# Altium PCB ST25RU3993_RF_MODULE_STENCIL_REV_E.PcbDoc
Units mil, origin at the board's own origin, x right, y up, seen from the top; angles counter-clockwise.
Board outline 3350 x 3250 mil, 4 copper layers (Top Layer, GND, Power, Bottom Layer), stack 67.68 mil thick; 49 components, 107 nets, 218 pads, 32 vias.
Unrouted connection lines stored in the file: 84.
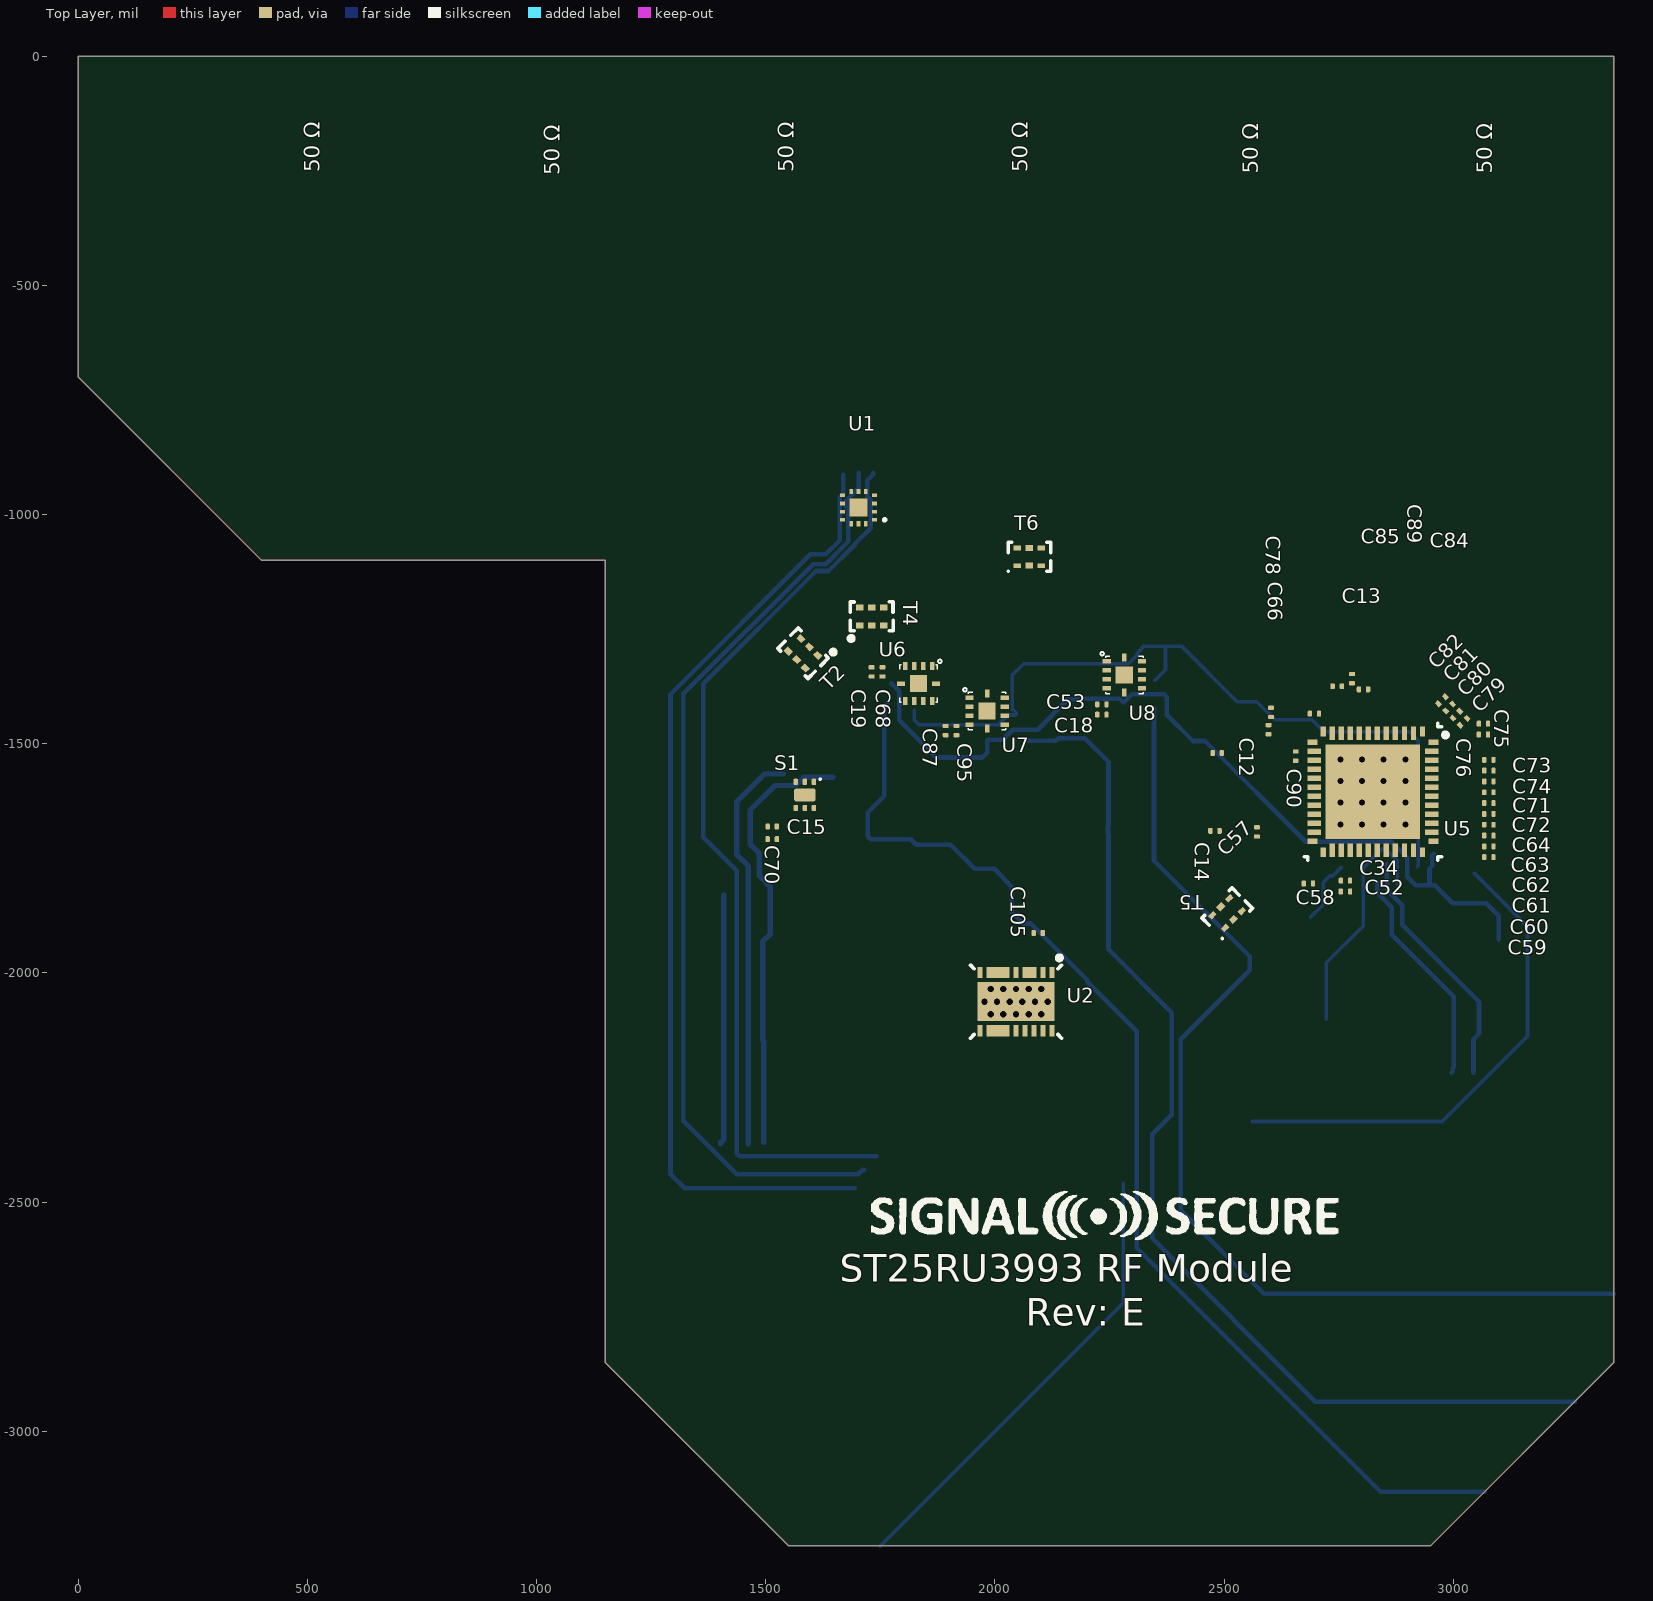
[diagram p0: Top Layer view]
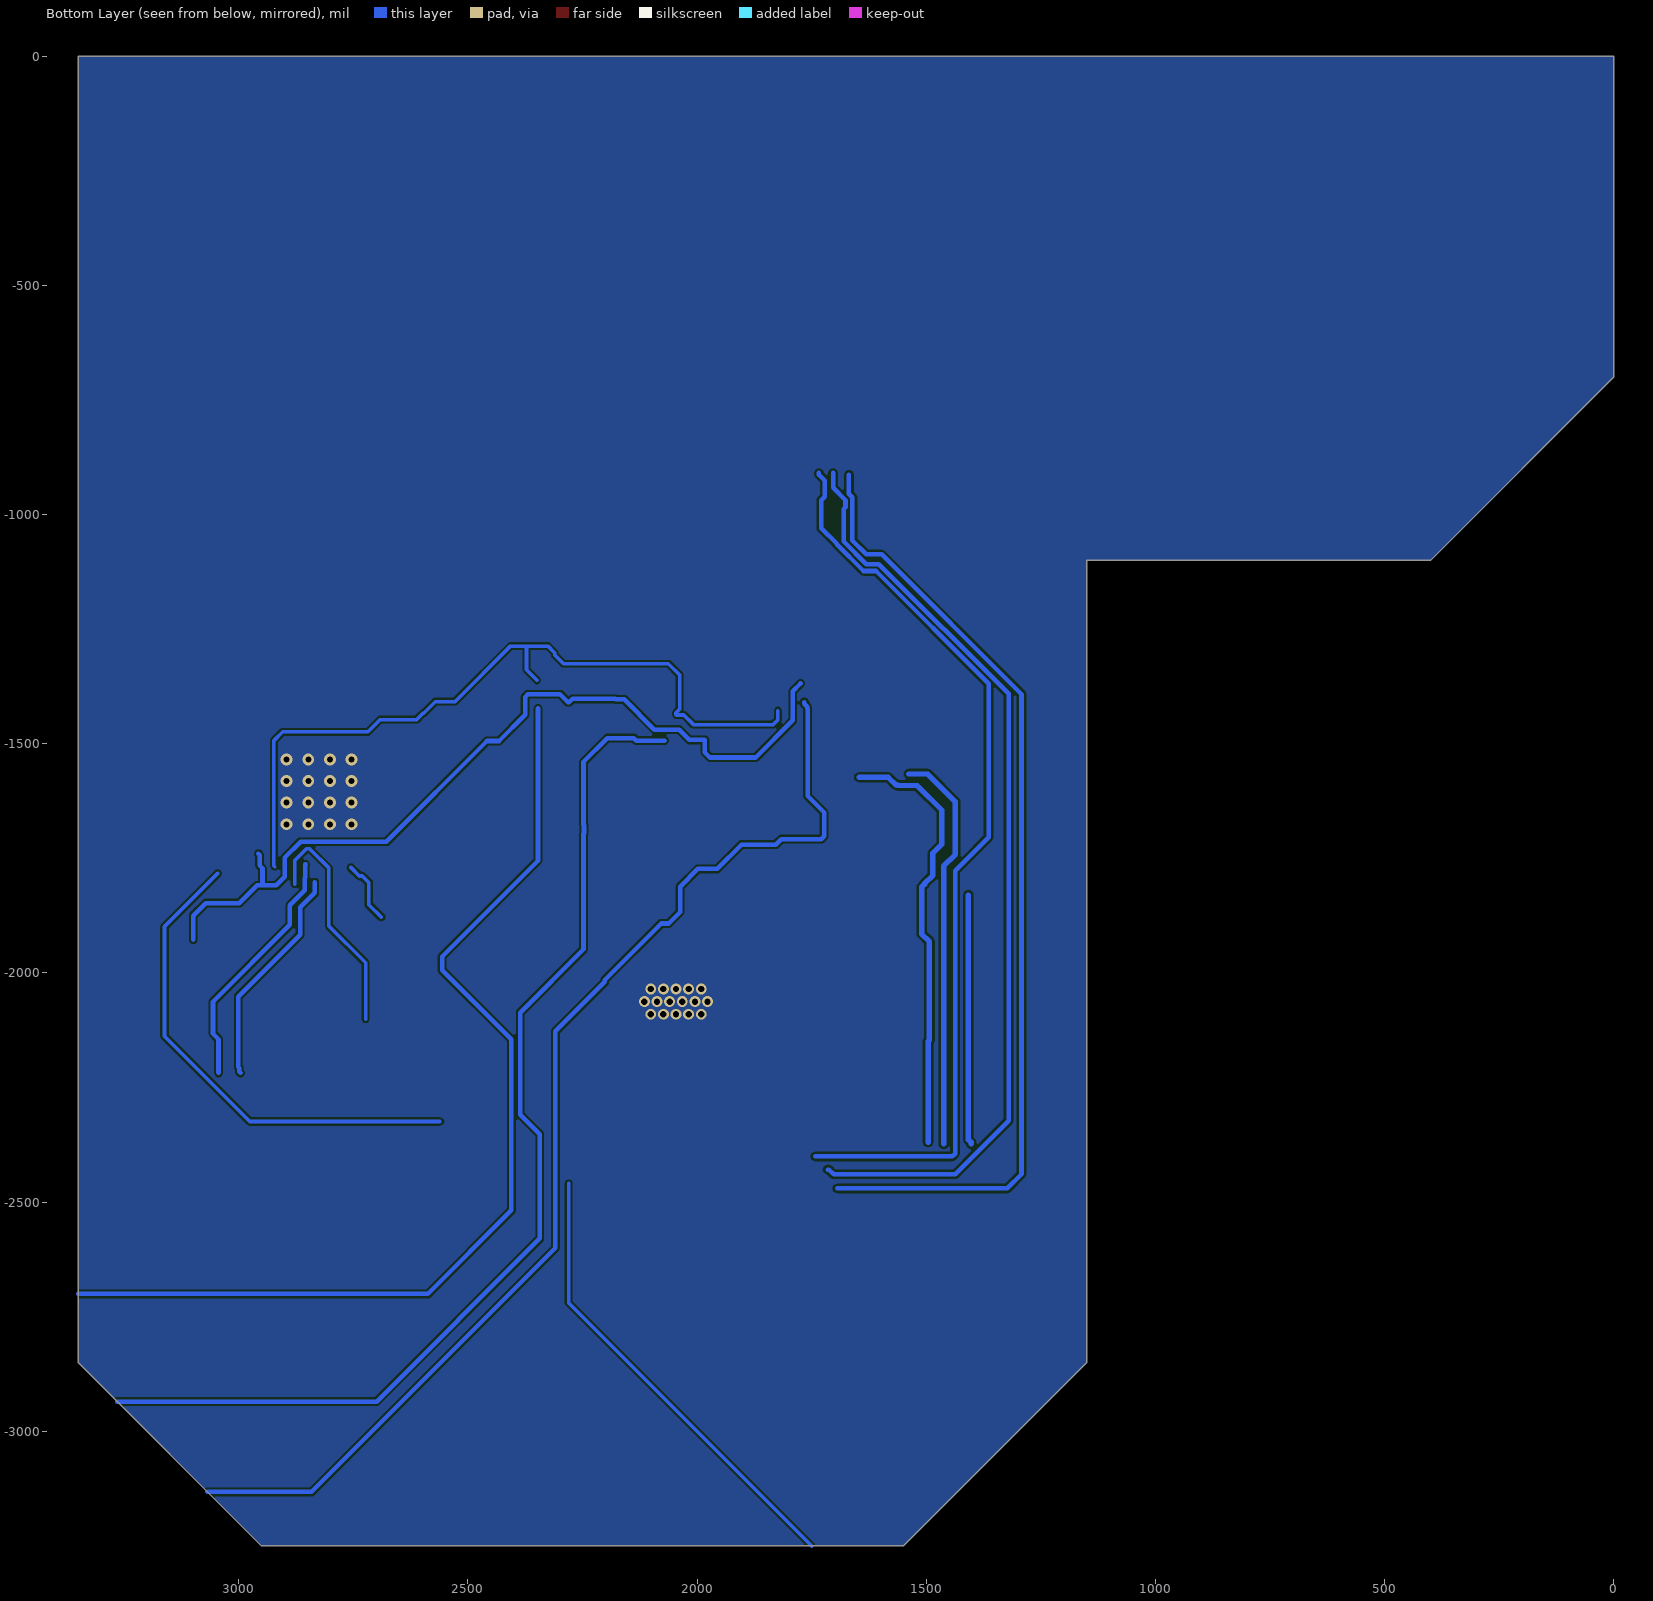
[diagram p1: Bottom Layer view, seen from below]
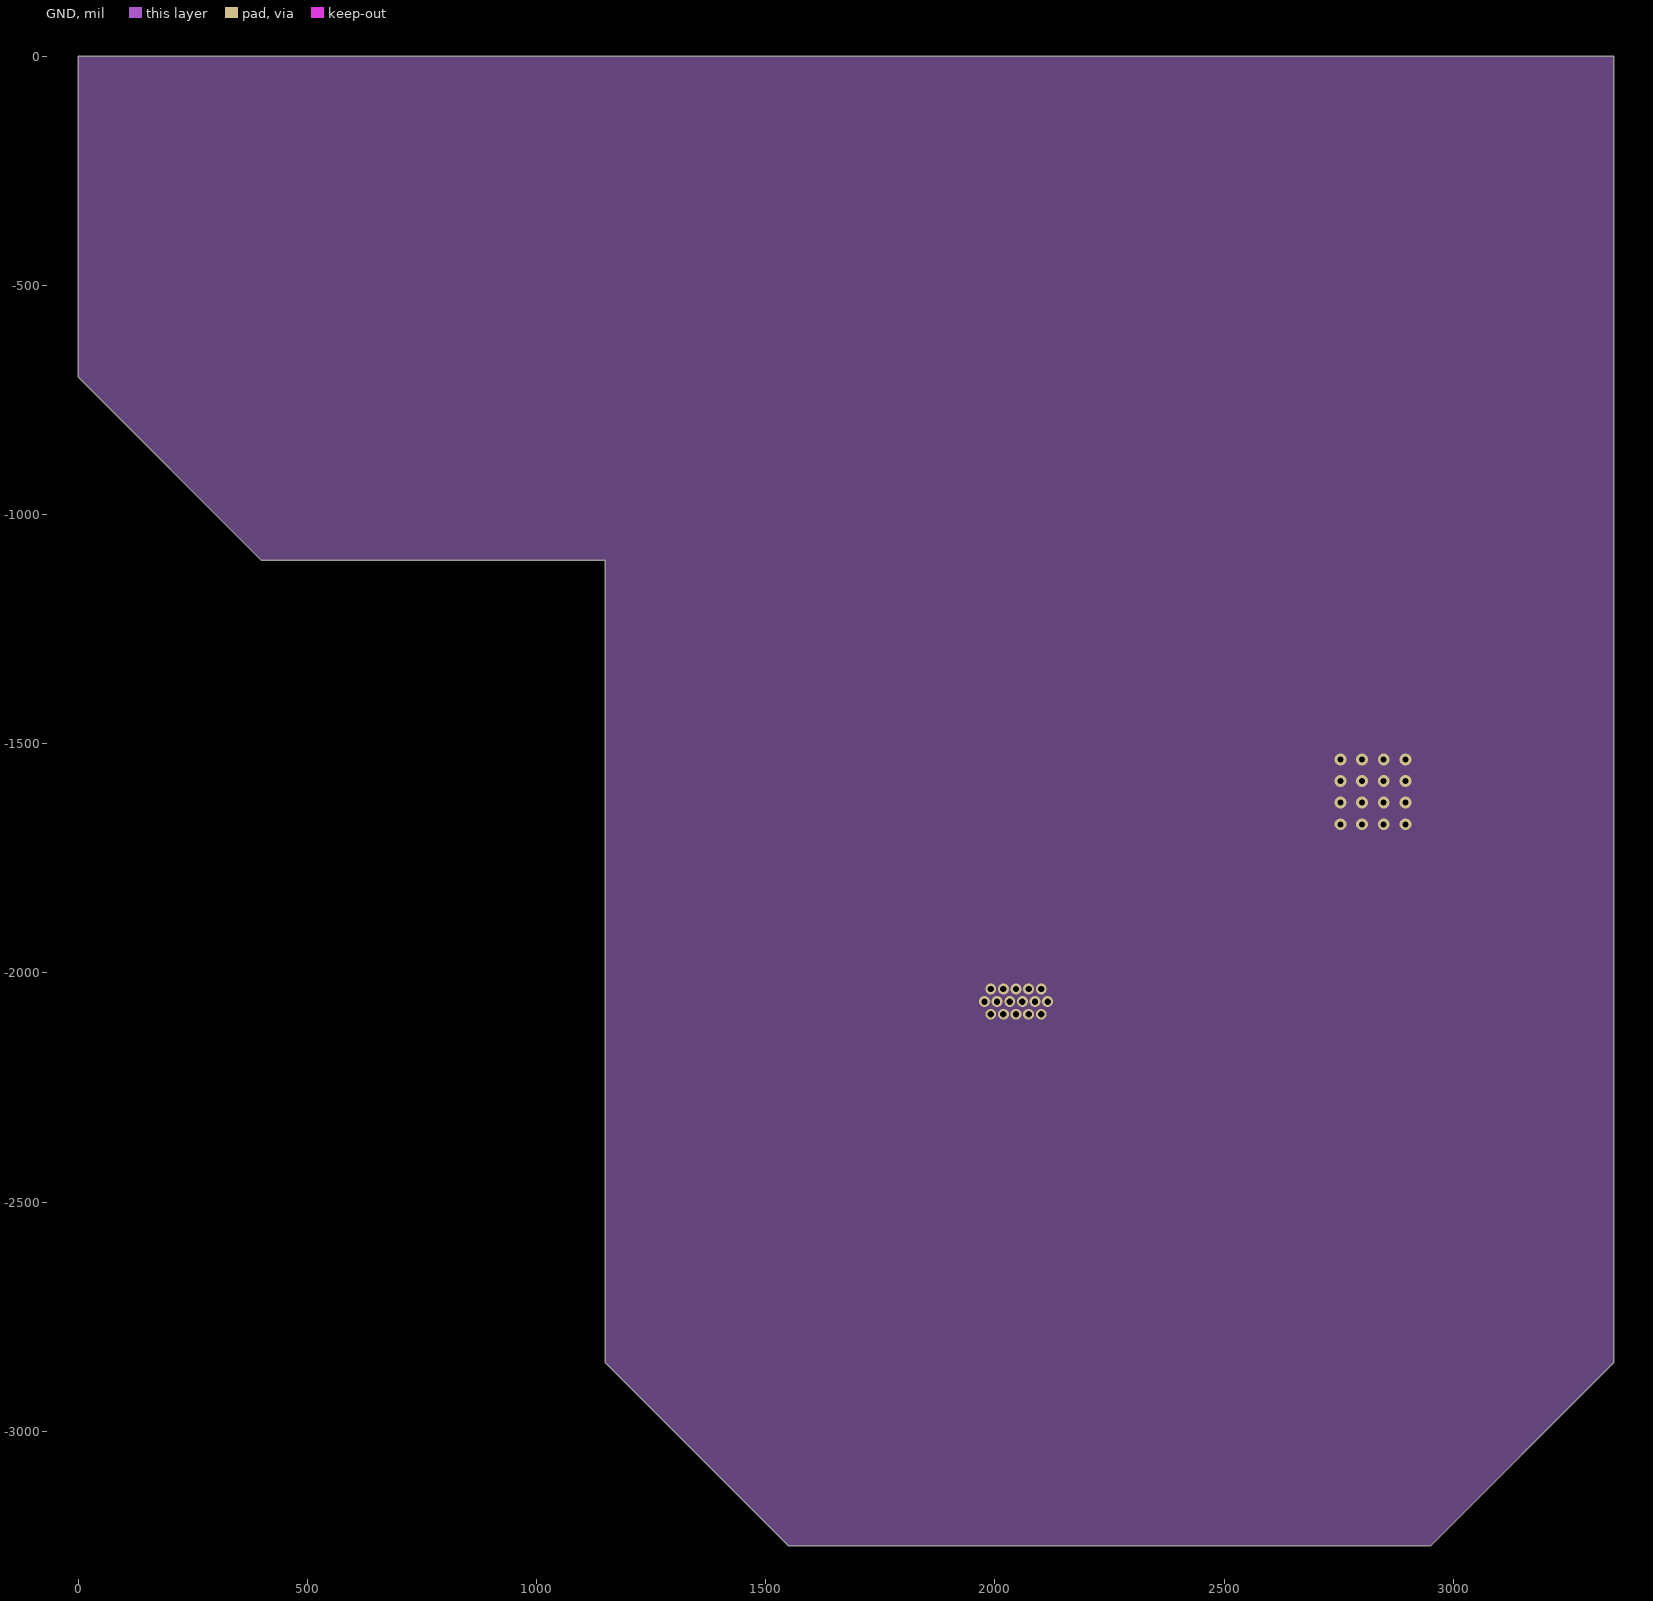
[diagram p2: GND]
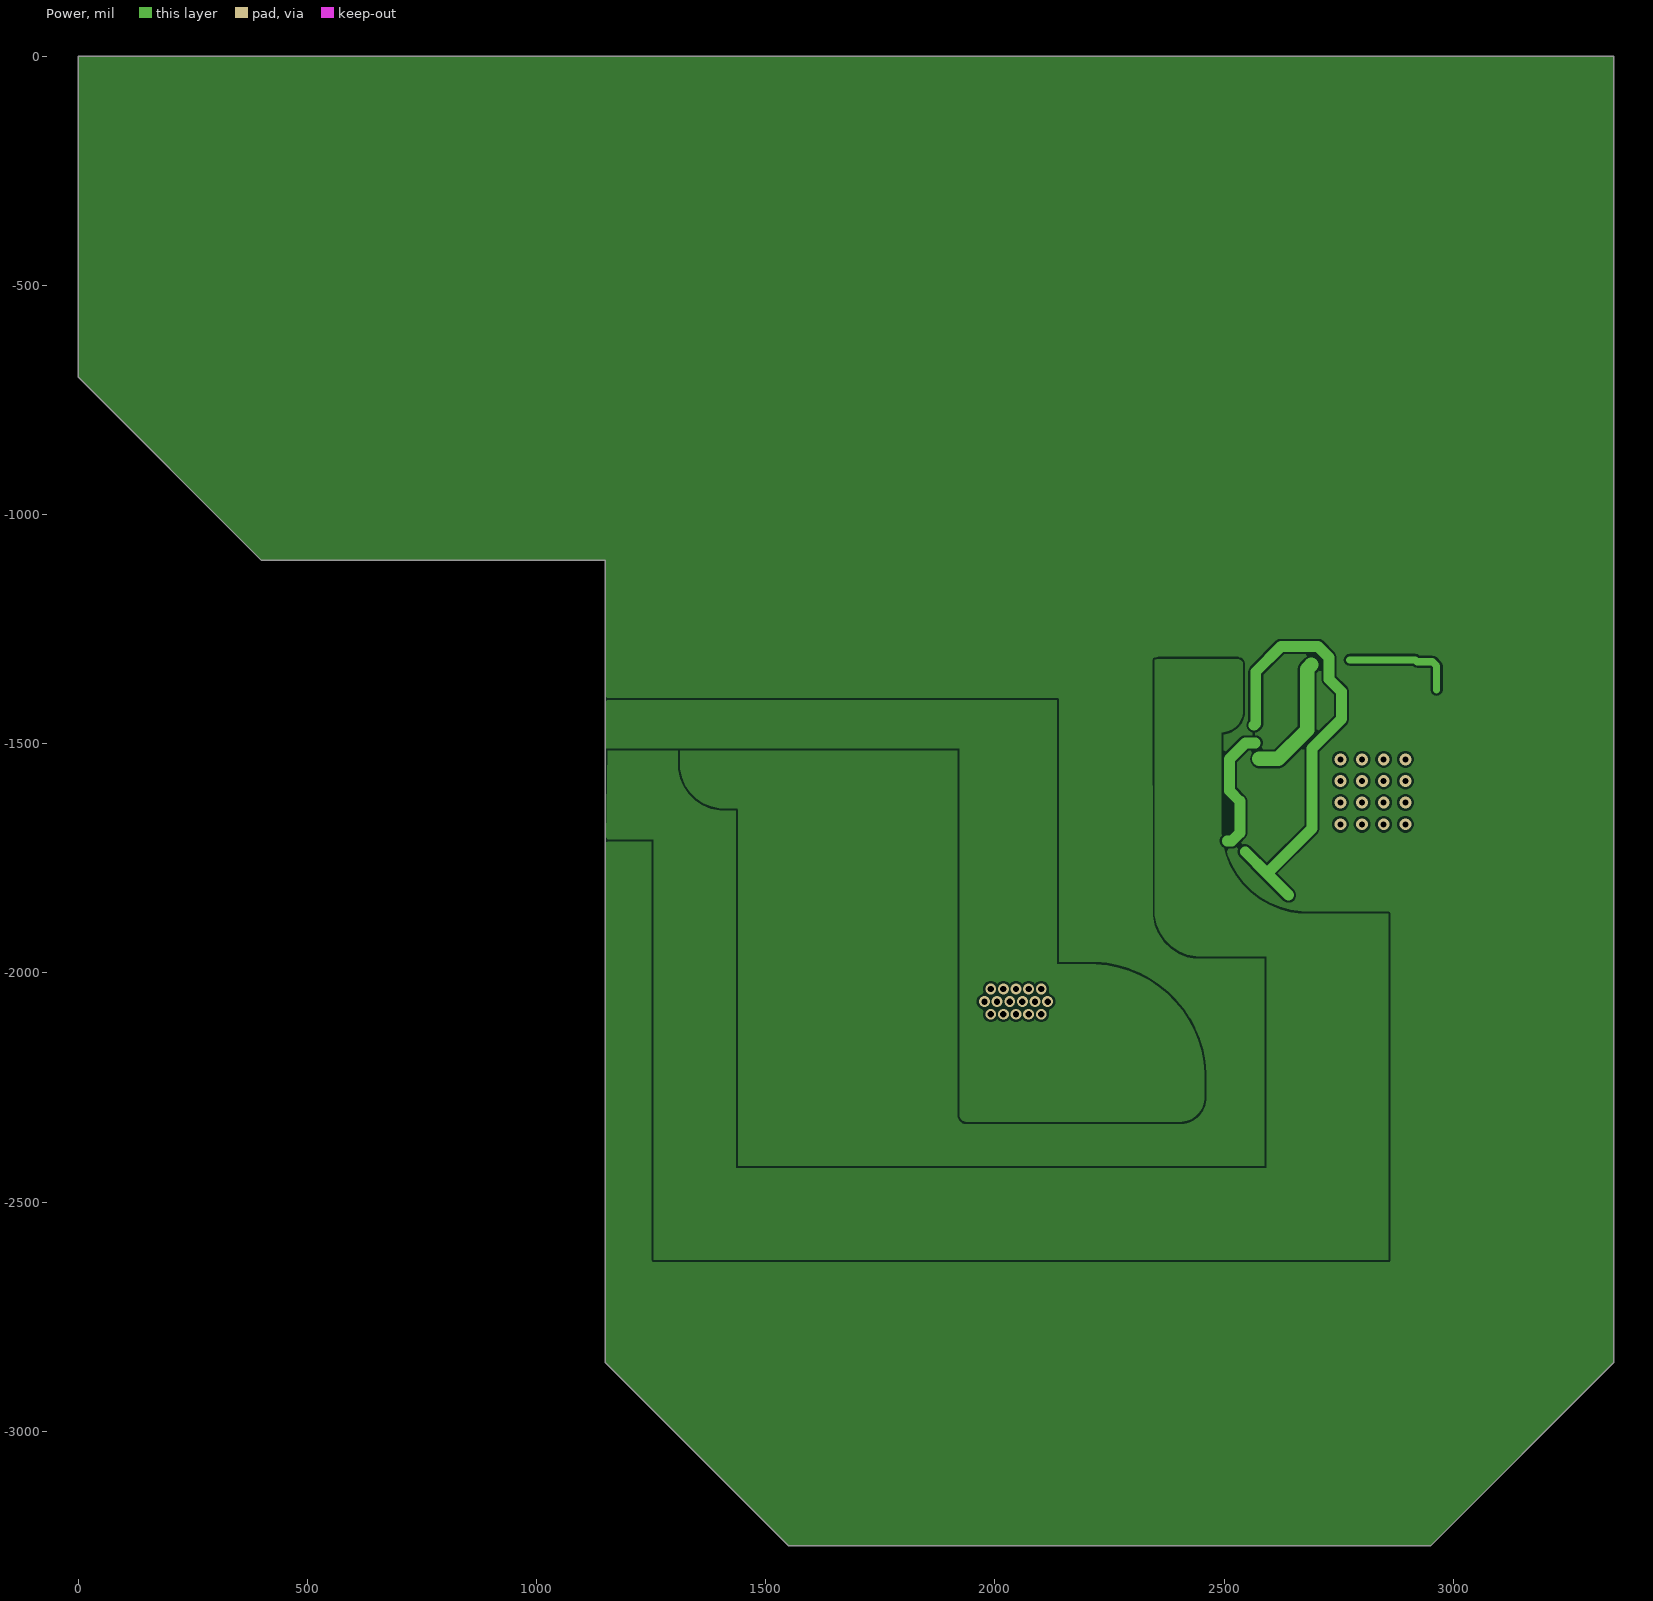
[diagram p3: Power]

## Layer stack, top to bottom
Top Solder: solder mask 1, Solder Resist, Dk 4.5
Top Layer: signal copper 1.7
Dielectric1: prepreg 7.96, FR408HR, Dk 3.69
GND: signal copper 0.68
Dielectric2: core 47, FR408HR, Dk 3.69
Power: signal copper 0.68
Dielectric 1: prepreg 7.96, FR408HR, Dk 3.69
Bottom Layer: signal copper 1.7
Bottom Solder: solder mask 1, Solder Resist, Dk 4.5

## Board outline
2950,-3250 3350,-2850 3350,0 0,0 0,-700 400,-1100 1150,-1100 1150,-2850 1550,-3250

## Design rules (kind name [scope] priority, off if disabled: settings)
AssemblyTestPointUsage [All] p1 off:
AssemblyTestpoint [All] p1 off: testpointundercomponent=TRUE minsize=40 maxsize=100 preferedsize=60 minholesize=0 maxholesize=40 preferedholesize=32 testpointgrid=1 usegrid=TRUE gridtolerance=0.01 allowsidetop=TRUE allowsidebottom=TRUE
Clearance [InNetClass('Differential_RF') and IsTrack or InNetClass('Differential_RF') and IsArc or InNetClass('Differential_RF') and IsPad or InNet('PAOUT_N')or InNet('PAOUT_P')or InNet('NetC5_2') or InNet('NetC4_2') or InNet('NetC7_2')or InNet('NetC6_1') vs InNamedPolygon('Top GND')] p1: gap=31.5 ignorepadtopadclearanceinfootprint=FALSE except(0: Arc-Hole Track-Hole SMDPad-Hole THPad-Hole Via-Hole Fill-Hole Poly-Hole Region-Hole Text-Hole)
Clearance Clearance_3 [InNetClass('SE_CPWG') and IsTrack or InNetClass('SE_CPWG') and IsArc or InNetClass('SE_CPWG') and IsPad vs InNamedPolygon('Top GND')] p2: gap=15.75 ignorepadtopadclearanceinfootprint=FALSE except(0: Arc-Hole Track-Hole SMDPad-Hole THPad-Hole Via-Hole Fill-Hole Poly-Hole Region-Hole Text-Hole)
Clearance Clearance_1 [InNet('NetT4_1') vs InNet('CPL_TN')] p3: gap=3.94 ignorepadtopadclearanceinfootprint=FALSE except(0: Arc-Hole Track-Hole SMDPad-Hole THPad-Hole Via-Hole Fill-Hole Poly-Hole Region-Hole Text-Hole)
Clearance Clearance_4 [InComponent('T4') or InComponent('U2') or InComponent('U3')] p4: gap=5 ignorepadtopadclearanceinfootprint=FALSE except(0: Arc-Hole Track-Hole SMDPad-Hole THPad-Hole Via-Hole Fill-Hole Poly-Hole Region-Hole Text-Hole)
Clearance Clearance_2 [All] p5: gap=5 ignorepadtopadclearanceinfootprint=FALSE except(0: Arc-Hole Track-Hole SMDPad-Hole THPad-Hole Via-Hole Fill-Hole Poly-Hole Region-Hole Text-Hole)
ComponentClearance ComponentClearance_2 [InComponent('SHIELD1')] p1: gap=0 collisioncheckmode=3 verticalgap=0 showdistances=FALSE
ComponentClearance [All] p2: gap=10 collisioncheckmode=3 verticalgap=10 showdistances=FALSE
DiffPairsRouting [InNetClass('PAOUT')] p1: maxlimit=10 minlimit=5 mostfreqgap=10 toplayer_maxgap=5 toplayer_prefgap=5 toplayer_minwidth=32.1 toplayer_maxwidth=32.1 toplayer_prefwidth=32.1 bottomlayer_maxgap=5 bottomlayer_prefgap=5 bottomlayer_minwidth=32.1 bottomlayer_maxwidth=32.1 bottomlayer_prefwidth=32.1 impedanceprofiledriven=TRUE impedanceprofileid={03FC9658-CDFA-40E1-9851-20E2EF889013} impedanceprofilevalue=50.000000 maxuncoupledlength=500
DiffPairsRouting DiffPairsRouting_RF [InNetClass('Differential_RF')] p2: maxlimit=22.83 minlimit=15 mostfreqgap=22.44 toplayer_maxgap=15 toplayer_prefgap=15 toplayer_minwidth=12.08 toplayer_maxwidth=12.08 toplayer_prefwidth=12.08 bottomlayer_maxgap=15 bottomlayer_prefgap=15 bottomlayer_minwidth=12.08 bottomlayer_maxwidth=12.08 bottomlayer_prefwidth=12.08 impedanceprofiledriven=TRUE impedanceprofileid={1FACFACD-6859-4A94-B60A-4F717C3D1123} impedanceprofilevalue=100.000000 maxuncoupledlength=0
FabricationTestPointUsage [All] p1 off: valid=0 allowmultiple=FALSE
FabricationTestpoint [All] p1 off: side=3 testpointundercomponent=TRUE minsize=40 maxsize=100 preferedsize=60 minholesize=0 maxholesize=40 preferedholesize=32 testpointgrid=1 allowsidetop=TRUE allowsidebottom=TRUE usegrid=TRUE gridtolerance=0.01
HoleSize FabricationTestpoint_1 [All] p1 off: absolutevalues=TRUE maxlimit=100 minlimit=1 maxpercent=80.000 minpercent=20.000
HoleSize FabricationTestPointUsage_1 [All] p2 off: absolutevalues=TRUE maxlimit=100 minlimit=1 maxpercent=80.000 minpercent=20.000
HoleSize [All] p3: absolutevalues=TRUE maxlimit=393.7 minlimit=5.91 maxpercent=80.000 minpercent=20.000
HoleToHoleClearance [ViaDiameter = 0.3] p1: gap=3.94 allowstackedmicrovias=TRUE
HoleToHoleClearance HoleToHoleClearance_1 [All] p2: gap=7.87 allowstackedmicrovias=TRUE
MatchedLengths [InNet('NetP1_2') or InNet('NetP2_2')] p1: tolerance=393.7 checknetsindiffpair=FALSE checkdiffpairvsdiffpair=TRUE checkxsignals=TRUE checkothers=TRUE
MinimumSolderMaskSliver [All] p1: minsoldermaskwidth=1.77
PlaneClearance [All] p1: clearance=19.68
PlaneConnect [All] p1: planeconnectstyle=Direct reliefexpansion=15.75 reliefentries=4 reliefconductorwidth=5.91 reliefairgap=5.91
PolygonConnect PolygonConnect_1 [InNet('GND')or InNet('MOD_BPLUS')or InNet('VPA')or InNet('VSUP')or InNet('5V') or InNet('NetC45_3') or InNet('NetC49_3')or InNet('VBUS')or InNet('NetP1_1') or InNet('NetC23_1')  or InNet('3V3')  or InNet('NetP1_5') or InNet('6V')] p1: connectstyle=Direct reliefconductorwidth=10 reliefentries=4 polygonreliefangle="90 Angle" airgapwidth=10
PolygonConnect [All] p2: connectstyle=Direct reliefconductorwidth=5.91 reliefentries=4 polygonreliefangle="90 Angle" airgapwidth=10
RoutingCorners [All] p1: cornerstyle=45-Degree minsetback=49.21 maxsetback=49.21
RoutingVias [All] p1: holewidth=7.87 width=23.62 viastyle="Through Hole" minholewidth=7.87 minwidth=7.87 maxholewidth=393.7 maxwidth=787.4
ShortCircuit ShortCircuit_1 [InComponent('B1')] p1: allowed=TRUE
ShortCircuit [All] p2: allowed=FALSE
SilkToSilkClearance [All] p1: silktosilkclearance=2
SilkToSolderMaskClearance [IsPad] p1: minsilkscreentomaskgap=0.2 clearancetoexposedcopper=TRUE
SolderMaskExpansion [All] p1: expansion=2.95 istentingtop=FALSE
Width Width_1 [InNetClass('SE_CPWG')] p1: maxlimit=16.54 minlimit=10.98 preferedwidth=16.22 toplayer_minwidth=16.22 toplayer_maxwidth=16.22 bottomlayer_minwidth=16.22 bottomlayer_maxwidth=16.22 impedanceprofiledriven=TRUE impedanceprofileid={BA523BF8-DAAF-41FE-A3D9-FB1800768F6D} impedanceprofilevalue=50.000000 minimp=50.000000 maximp=50.000000 favimp=50.000000
Width [All] p2: maxlimit=393.7 minlimit=5 preferedwidth=10 minimp=50.000000 maximp=50.000000 favimp=50.000000
15 further rules are at their usual default settings.

## Classes and differential pairs
net class PAOUT: NetC6_1 NetC7_2 PAOUT_N PAOUT_P
component class System_Overview_HP: H1 Shield2
net class Differential_RF: IN_N IN_P RFO_N RFO_P RX_N RX_P TX_N TX_P
component class "UHF RFID Reader": C12 C13 C14 C34 C52 C57 C58 C59 C60 C61 C62 C63 C64 C66 C71 C72 C73 C74 C75 C76 C78 C79 C80 C81 C82 C84 C85 C89 C90 T5 Title_Block_Antenna6 U5
component class "Power Amplifier": C15 C70 C105 S1 T2 Title_Block_Antenna4 U2
component class "Carrier Cancellation": C18 C19 C53 C68 C87 C95 T4 T6 Title_Block_Antenna7 U6 U7 U8
net class SE_CPWG: LP_Filter_IN LP_Filter_OUT NetANT1_IN NetANT2_IN NetANT3_IN NetANT4_IN NetANT5_IN NetANT6_IN NetC32_1 NetC32_2 NetC37_1 NetC37_2 NetC107_1 NetC107_2 NetC108_1 NetC108_2 NetC109_1 NetC112_1 NetC112_2 NetJ1_IN NetJ1_OUT NetJ3_IN NetJ3_OUT NetL12_2 NetR22_2 NetR23_2 NetR24_2 NetT2_1 PA_OUT
component class "Antenna Switch": Title_Block_Antenna7 U1
differential pair PAOUT: +PAOUT_P -PAOUT_N
differential pair TX: +TX_P -TX_N
differential pair RX: +RX_P -RX_N
differential pair IN: +IN_P -IN_N
differential pair RFO: +RFO_P -RFO_N

## Components (designator, comment, footprint, x,y, rotation, side; value= is the part's Value field where it differs from the comment)
C12 "120pF" C0201-RF 2484.96,-1520 r0 top
C13 "2u2F" C0201-RF 2696.96,-1434.16 r180 top
C14 "120pF" C0201-RF 2479.96,-1690 r180 top
C15 "2u2F" C0201-RF 1514.06,-1680.56 r0 top
C18 "2u2F" C0201-RF 2233.12,-1436.46 r180 top
C19 "2u2F" C0201-RF 1730.95,-1343.16 r270 top
C34 "30 pF" C0201-RF 2764.61,-1798.67 r180 top
C52 "2u2F" C0201-RF 2764.61,-1822.29 r0 top
C53 "120pF" C0201-RF 2233.12,-1413.83 r180 top
C57 "120pF" C0201-RF 2571.5,-1692.37 r270 top
C58 "120pF" C0201-RF 2683.71,-1804.57 r0 top
C59 "2u2F" C0201-RF 3077.41,-1747.49 r0 top
C60 "120pF" C0201-RF 3077.41,-1723.87 r0 top
C61 "2u2F" C0201-RF 3077.41,-1700.24 r0 top
C62 "120pF" C0201-RF 3077.41,-1676.62 r0 top
C63 "2u2F" C0201-RF 3077.41,-1653 r0 top
C64 "120pF" C0201-RF 3077.41,-1629.38 r0 top
C66 "2u2F" C0201-RF 2596.9,-1469.31 r90 top
C68 "120pF" C0201-RF 1754.57,-1343.16 r270 top
C70 "120pF" C0201-RF 1514.06,-1708.12 r0 top
C71 "2u2F" C0201-RF 3077.41,-1582.13 r0 top
C72 "30 pF" C0201-RF 3077.41,-1605.76 r0 top
C73 "2u2F" C0201-RF 3077.41,-1534.89 r0 top
C74 "30 pF" C0201-RF 3077.41,-1558.51 r0 top
C75 "2u2F" C0201-RF 3065.6,-1456.15 r0 top
C76 "120pF" C0201-RF 3065.6,-1479.77 r0 top
C78 "2u2F" C0201-RF 2602.4,-1431.47 r90 top
C79 "10nF" C0201-ss 3022.29,-1452.21 r45 top
C80 "10nF" C0201-ss 3006.54,-1436.46 r45 top
C81 "10nF" C0201-ss 2990.8,-1420.72 r45 top
C82 "10nF" C0201-ss 2975.05,-1404.97 r45 top
C84 "2u2F" C0201-RF 2803.98,-1381.35 r0 top
C85 "2u2F" C0201-RF 2746.7,-1374.46 r0 top
C87 "2u2F" C0201-RF 1892.37,-1471.11 r270 top
C89 "2u2F" C0201-RF 2779.02,-1357.98 r90 top
C90 "2u2F" C0201-RF 2656.15,-1527.02 r270 top
C95 "120pF" C0201-RF 1915.99,-1471.11 r270 top
C105 "2u2F" C0201-RF 2094.34,-1912.84 r180 top
S1 "SP2T" SKY13431-374LF 1585.28,-1611.66 r270 top
T2 "20 dB Dir Coupler" DC0710J5010AHF 1581.35,-1302.61 r225 top
T4 "10dB Dir Coupler" DC0710J5010AHF 1731,-1222 r90 top
T5 "BD0810J50100A00" BD0810J50100AHF 2506.54,-1869.54 r135 top
T6 "BD0810J50100A00" BD0810J50100AHF 2075,-1092 r90 top
U1 "SKY13416-485LF" SKY13416485LF 1702.25,-984.76 r180 top
U2 "TQP9107" TQP9107 2045.91,-2062.45 r0 top
U5 "ST25RU3993" ST25RU3993_QFN48_0.5mm_pitch 2824.46,-1604.77 r270 top
U6 "PE64906B-Z" PE62304 1833.32,-1368.55 r270 top
U7 "PE64906B-Z" PE62304 1982.92,-1428.59 r0 top
U8 "PE64906B-Z" PE62304 2282.13,-1349.85 r0 top

## Footprints (in the part's own frame and the unit in brackets; to place one, negate y for a bottom-side part, rotate by r counter-clockwise, add the part's x,y. Pads: shape width x height; smd on the part's side, far side on the other; paste and mask are expansions set on the pad)
BD0810J50100AHF [mm] "RF Balun 800MHz ~ 1GHz 50 / 100 Ohm 0805"
  rect 0.27x0.41 smd mask+0.04: 1(-0.495,0.66) 3(-0.495,-0.66) 4(0.495,-0.66) 6(0.495,0.66)
  rect 0.33x0.41 smd mask+0.04: 2(-0.495,0) 5(0.495,0)
  silkscreen extent -0.8,-1.19 0.8,1.18, body extent -0.65,-1.03 0.65,1.03, height 0.86
C0201-RF [mm]
  rrect50% 0.24x0.33 smd paste-3 mask+0.005: 1(-0.255,0) 2(0.255,0)
  body extent -0.3,-0.15 0.3,0.15, height 0.23
C0201-ss [mm]
  rect 0.25x0.33 smd paste+0 mask+0.01: 1(-0.27,0) 2(0.27,0)
  body extent -0.3,-0.15 0.3,0.15, height 0.23
DC0710J5010AHF [mm] "Directional Coupler"
  rect 0.33x0.41 smd mask+0.04: 1(-0.495,0.66) 2(-0.495,0) 3(-0.495,-0.66) 4(0.495,-0.66) 5(0.495,0) 6(0.495,0.66)
  silkscreen extent -1.35,-1.19 0.8,1.26, body extent -0.65,-1.03 0.65,1.03, height 0.86
PE62304 [mm] "Digitally Tunable Capacitor for GSM/WCDMA"
  rect 0.45x0.25 smd mask+0.05: 1(-0.975,0.75) 2(-0.975,0.25) 3(-0.975,-0.25) 4(-0.975,-0.75) 6(0.975,-0.75) 7(0.975,-0.25) 8(0.975,0.25) 9(0.975,0.75)
  rect 0.25x0.45 smd mask+0.05: 5(0,-0.975) 10(0,0.975)
  rect 0.95x0.95 smd mask+0.05: 10(0,0)
  silkscreen extent -1.33,-1.04 1.04,1.28, body extent -1,-1.07 1,0.92, height 0.6
SKY13431-374LF [mm] "6 Pin DFN"
  rrect50% 0.35x0.25 smd mask+0.05: 1(-0.725,0.5) 2(-0.725,0) 3(-0.725,-0.5) 4(0.725,-0.5) 5(0.725,0) 6(0.725,0.5)
  rrect30% 0.7x1.2 smd mask+0.05: 7(0,0)
  silkscreen extent -0.92,0.8 -0.83,0.9, body extent -0.75,-0.75 0.75,0.75, height 0.5
SKY13416485LF [mm]
  rect 0.28x0.2 smd: 1(-0.895,0.675) 2(-0.895,0.225) 3(-0.895,-0.225) 4(-0.895,-0.675) 8(0.895,-0.675) 9(0.895,-0.225) 10(0.895,0.225) 11(0.895,0.675)
  rect 0.2x0.28 smd: 5(-0.4,-0.895) 6(0,-0.895) 7(0.4,-0.895) 12(0.4,0.895) 13(0,0.895) 14(-0.4,0.895)
  rect 1x1 smd: 15(0,0)
  silkscreen extent -1.5,0.63 -1.4,0.72, body extent -1.01,-1.01 1.01,1.01, height 0.7
ST25RU3993_QFN48_0.5mm_pitch [mm] "QFN, 48-Leads, Body 7,0x7,0mm (max), Pitch 0,50mm, IPC Medium Density"
  rect 0.55x0.3 smd paste+0 mask+0.05: 1(-3.35,2.75) 12(-3.35,-2.75) 25(3.35,-2.75) 36(3.35,2.75)
  rect 0.75x0.3 smd mask+0.05: 2(-3.25,2.25)
  rect 0.75x0.3 smd paste+0 mask+0.05: 3(-3.25,1.75) 4(-3.25,1.25) 5(-3.25,0.75) 6(-3.25,0.25) 7(-3.25,-0.25) 8(-3.25,-0.75) 9(-3.25,-1.25) 10(-3.25,-1.75) 11(-3.25,-2.25) 26(3.25,-2.25) 27(3.25,-1.75) 28(3.25,-1.25) 29(3.25,-0.75) 30(3.25,-0.25) 31(3.25,0.25) 32(3.25,0.75) 33(3.25,1.25) 34(3.25,1.75) 35(3.25,2.25)
  rect 0.3x0.55 smd paste+0 mask+0.05: 13(-2.75,-3.35) 24(2.75,-3.35) 37(2.75,3.35) 48(-2.75,3.35)
  rect 0.3x0.75 smd paste+0 mask+0.05: 14(-2.25,-3.25) 15(-1.75,-3.25) 16(-1.25,-3.25) 17(-0.75,-3.25) 18(-0.25,-3.25) 19(0.25,-3.25) 20(0.75,-3.25) 21(1.25,-3.25) 22(1.75,-3.25) 23(2.25,-3.25) 38(2.25,3.25) 39(1.75,3.25) 40(1.25,3.25) 41(0.75,3.25) 42(0.25,3.25) 43(-0.25,3.25) 44(-0.75,3.25) 45(-1.25,3.25) 46(-1.75,3.25) 47(-2.25,3.25)
  rect 5.24x5.24 smd mask+0.07: 49(0,0)
  silkscreen extent -3.8,-3.8 3.8,4.15, body extent -3.5,-3.5 3.5,3.5, height 1
TQP9107 [mm] "699 – 960 MHz 2-stage Power Amplifier"
  rect 0.27x0.62 smd mask+0.05: 1(2,1.62) 2(1.5,1.62) 4(0,1.62) 6(-2,1.62) 7(-2,-1.62) 9(0,-1.62) 10(0.5,-1.62) 11(1,-1.62) 12(1.5,-1.62) 13(2,-1.62)
  rect 0.77x0.62 smd mask+0.05: 3(0.75,1.62)
  rect 1.27x0.62 smd mask+0.05: 5(-1,1.62) 8(-1,-1.62)
  rect 4.28x2.16 smd mask+0.05: 14(0,0)
  silkscreen extent -2.53,-2.03 2.53,2.55, body extent -2.25,-1.75 2.25,1.75, height 0.85

## Part data
C12 C14 C53 C57 C58 C60 C62 C64 C68 C70 C76 C95: library part GRM0335C1H121JA01D, "CAP CER 120PF 50V C0G/NP0 0201", Manufacturer="Murata Electronics North America", Operating Temperature="-55°C ~ 125°C", Package / Case="0201 (0603 Metric)", Ratings=-, Supplier Part Number 1=490-7221-1-ND, Temperature Coefficient="C0G, NP0", Tolerance=±5%, Voltage - Rated=50V, Applications="General Purpose", Category=Capacitors, ComponentLink1Description=http://search.murata.co.jp/Ceramy/image/img/A01X/G101/ENG/GRM0335C1H121JA01-01.pdf, ComponentLink1URL=http://search.murata.co.jp/Ceramy/image/img/A01X/G101/ENG/GRM0335C1H121JA01-01.pdf, Exact Component Match=no, Features=-, Height - Seated (Max)=-, Lead Spacing=-, Lead Style=-, Manufacturer Part Number=GRM0335C1H121JA01D, Mounting Type="Surface Mount, MLCC", Packaging="Cut Tape (CT)", Part Status=Active, Pricing 1="1=0.08, 10=0.012, 100=0.0053, 500=0.00376, 1000=0.00295, 2500=0.00268, 5000=0.00247 (EUR)", RoHs="RoHS Compliant", Size / Dimension="0.024\" L x 0.012\" W (0.60mm x 0.30mm)", Stock=535610, Supplier 1=Digi-Key, Thickness (Max)="0.013\" (0.33mm)"
C13 C15 C18 C19 C52 C59 C61 C63 C66 C71 C73 C75 C78 C84 C85 C87 C89 C90 C105: library part GRM033R60J225ME15D, "CAP CER 2.2UF 6.3V X5R 0201", Capacitance=2.2µF, Manufacturer="Murata Electronics North America", Operating Temperature="-55°C ~ 85°C", Package / Case="0201 (0603 Metric)", Ratings=-, Supplier Part Number 1=490-13224-1-ND, Temperature Coefficient=X5R, Tolerance=±20%, Voltage - Rated=6.3V, Applications="General Purpose", Category=Capacitors, ComponentLink1Description=http://www.murata.com/~/media/webrenewal/support/library/catalog/products/capacitor/mlcc/c02e.pdf, ComponentLink1URL=http://www.murata.com/~/media/webrenewal/support/library/catalog/products/capacitor/mlcc/c02e.pdf, Exact Component Match=no, Features="Derating Recommended", Height - Seated (Max)=-, Lead Spacing=-, Lead Style=-, Manufacturer 1="Murata Electronics North America", Manufacturer Part Number=GRM033R60J225ME15D, Manufacturer Part Number 1=GRM033R60J225ME15D, Mounting Type="Surface Mount, MLCC", Packaging="Cut Tape (CT)", Part Status=Active, Pricing 1="1=0.24, 10=0.203, 50=0.1144, 100=0.1015, 250=0.07616, 500=0.06728, 1000=0.05966, 5000=0.0495 (EUR)", RoHs="RoHS Compliant", Size / Dimension="0.024\" L x 0.012\" W (0.60mm x 0.30mm)", Stock 1=16305, Supplier 1=Digi-Key, Thickness (Max)="0.014\" (0.35mm)"
C34 C72 C74: library part GRM0335C1H300GA01D, "CAP CER 30PF 50V C0G/NP0 0201", Manufacturer="Murata Electronics North America", Operating Temperature="-55°C ~ 125°C", Package / Case="0201 (0603 Metric)", Ratings=-, Supplier Part Number 1=490-14560-1-ND, Temperature Coefficient="C0G, NP0", Tolerance=±2%, Voltage - Rated=50V, Applications="General Purpose", Category=Capacitors, ComponentLink1Description=http://search.murata.co.jp/Ceramy/image/img/A01X/G101/ENG/GRM0335C1H300GA01-01.pdf, ComponentLink1URL=http://search.murata.co.jp/Ceramy/image/img/A01X/G101/ENG/GRM0335C1H300GA01-01.pdf, Exact Component Match=no, Failure Rate=-, Features=-, Height - Seated (Max)=-, Lead Spacing=-, Lead Style=-, Manufacturer Part Number=GRM0335C1H300GA01D, Mounting Type="Surface Mount, MLCC", Packaging="Cut Tape (CT)", Part Status=Active, Pricing="1=0.08, 10=0.014, 100=0.0063, 500=0.00452, 1000=0.00354, 2500=0.00322, 5000=0.00296 (EUR)", RoHs="RoHS Compliant", Size / Dimension="0.024\" L x 0.012\" W (0.60mm x 0.30mm)", Stock=40960, Supplier 1=Digi-Key, Thickness (Max)="0.013\" (0.33mm)"
C79 C80 C81 C82: library part GRM033R61E103KA12D, "CAP CER 10000PF 10V X7R 0201", Capacitance=10000pF, Manufacturer="Murata Electronics North America", Manufacturer Part Number=GRM033R71A103KA01D, Operating Temperature="-55°C ~ 125°C", Package / Case="0201 (0603 Metric)", Ratings=-, Supplier Part Number 1=490-3194-1-ND, Temperature Coefficient=X7R, Tolerance=±10%, Voltage - Rated=10V, Applications="General Purpose", Category=Capacitors, ComponentLink1Description=http://www.murata.com/~/media/webrenewal/support/library/catalog/products/capacitor/mlcc/c02e.pdf, ComponentLink1URL=http://www.murata.com/~/media/webrenewal/support/library/catalog/products/capacitor/mlcc/c02e.pdf, ComponentLink2Description=http://search.murata.co.jp/Ceramy/image/img/A01X/G101/ENG/GJM1555C1H110GB01-01.pdf, ComponentLink2URL=http://search.murata.co.jp/Ceramy/image/img/A01X/G101/ENG/GJM1555C1H110GB01-01.pdf, Exact Component Match=no, Features=-, Height - Seated (Max)=-, Lead Spacing=-, Lead Style=-, Manufacturer 1="Murata Electronics North America", Manufacturer Part Number 1=GRM033R71A103KA01D, Mounting Type="Surface Mount, MLCC", Packaging="Cut Tape (CT)", Part Status=Active, Pricing="1=0.16, 10=0.11, 100=0.0559, 500=0.03826, 1000=0.03384, 2500=0.03237, 5000=0.02943 (EUR)", Pricing 1="1=0.09, 10=0.017, 50=0.0096, 100=0.0081, 250=0.00664, 500=0.00568, 1000=0.00443, 5000=0.00369 (EUR)", RoHs="RoHS Compliant", Size / Dimension="0.024\" L x 0.012\" W (0.60mm x 0.30mm)", Stock=28598, Stock 1=4876651, Supplier 1=Digi-Key, Supplier 2=Digi-Key, Supplier Part Number 2=490-6072-1-ND, Thickness (Max)="0.013\" (0.33mm)"
S1: library part SKY13431-374LF, "IC SWITCH SP2T", Frequency - Lower=500MHz, Insertion Loss @ Frequency="0.8dB @ 5.8GHz", Isolation @ Frequency="20dB @ 5.8GHz (typ)", Manufacturer="Skyworks Solutions Inc.", Operating Temperature="-40°C ~ 85°C", Package / Case="6-XFDFN Exposed Pad", Supplier Device Package="6-DFN (1.5x1.5)", Supplier Part Number 1=863-1651-1-ND, Voltage - Supply="2.5 V ~ 5 V", Category="RF/IF and RFID", Circuit=SPDT, ComponentLink1Description=http://www.skyworksinc.com/uploads/documents/SKY13431_374LF_201649C.pdf, ComponentLink1URL=http://www.skyworksinc.com/uploads/documents/SKY13431_374LF_201649C.pdf, Exact Component Match=no, Features=-, IIP3="57dBm (typ)", Impedance="50 Ohm", Manufacturer Part Number=SKY13431-374LF, P1dB=36dBm, Packaging="Cut Tape (CT)", Part Status=Active, Pricing="1=1.28, 10=1.144, 100=0.8921, 500=0.73694, 1000=0.5818 (EUR)", RF Type="WiMax, WLAN", RoHs="RoHS Compliant", Stock=3887, Supplier 1=Digi-Key, Topology=-
T2: library part DC0710J5020AHF, "COUPLER 20DB 700-1000MHZ 0805", Case/Package=0805, Case Code (Metric)=2012, Frequency=700MHz, Manufacturer=Anaren, Max Operating Temperature=85°C, Max Power Dissipation=2W, Min Operating Temperature=-55°C, Package Quantity=4000, Supplier Part Number 1=1173-1085-1-ND, Case Code (Imperial)=0805, ComponentLink1Description=https://datasheet.ciiva.com/2794/dc0710j5020ahf-data20sheet-revd-2794214.pdf?src-supplier=Digi-Key, ComponentLink1URL=https://datasheet.ciiva.com/2794/dc0710j5020ahf-data20sheet-revd-2794214.pdf?src-supplier=Digi-Key, ComponentLink2Description=https://datasheet.ciiva.com/4548/dc0710j5020ahf-data20sheet-revd-26973-4548407.pdf?src-supplier=Mouser, ComponentLink2URL=https://datasheet.ciiva.com/4548/dc0710j5020ahf-data20sheet-revd-26973-4548407.pdf?src-supplier=Mouser, ComponentLink3Description=https://datasheet.ciiva.com/2794/dc0710j5020ahf-datasheet-revd-2794215.pdf?src-supplier=Digi-Key, ComponentLink3URL=https://datasheet.ciiva.com/2794/dc0710j5020ahf-datasheet-revd-2794215.pdf?src-supplier=Digi-Key, ComponentLink4Description=https://datasheet.ciiva.com/15213/getdatasheetpartid-559400-15213447.pdf?src-supplier=Verical, ComponentLink4URL=https://datasheet.ciiva.com/15213/getdatasheetpartid-559400-15213447.pdf?src-supplier=Verical, ComponentLink5Description=https://datasheet.ciiva.com/2794/dc0710j5020ahf-datasheet-revd-2794216.pdf?src-supplier=Digi-Key, ComponentLink5URL=https://datasheet.ciiva.com/2794/dc0710j5020ahf-datasheet-revd-2794216.pdf?src-supplier=Digi-Key, Contact Plating=Gold, Insertion Loss=0.22dB, Manufacturer Part Number=DC0710J5020AHF, Mount="Surface Mount", Number of Pins=6, Packaging="Tape and Reel", Return Loss=21.41dB, RoHs=Yes, Stock 1=12905, Supplier 1=Digi-Key, Termination=SMD/SMT
T4: library part DC0710J5010AHF, "Directional Coupler", Frequency="700MHz ~ 1GHz", Manufacturer=Anaren, Package / Case="0805 (2012 Metric)", Power - Max=2W, Supplier Device Package=0805, Supplier Part Number 1=1173-1084-1-ND, Applications="General Purpose", Category="RF/IF and RFID", ComponentLink1Description=https://cdn.anaren.com/product-documents/Xinger/DirectionalCouplers/DC0710J5010AHF/DC0710J5010AHF_DataSheet(Rev_B).pdf, ComponentLink1URL=https://cdn.anaren.com/product-documents/Xinger/DirectionalCouplers/DC0710J5010AHF/DC0710J5010AHF_DataSheet(Rev_B).pdf, Coupler Type=Standard, Coupling Factor=10.9dB, Exact Component Match=no, Insertion Loss=0.21dB, Isolation=-, Manufacturer Part Number=DC0710J5010AHF, Packaging="Cut Tape (CT)", Part Status=Active, Pricing="1=0.74, 10=0.654, 25=0.5904, 100=0.5167, 250=0.45344, 500=0.4007 (EUR)", Return Loss=17.5dB, RoHs="RoHS Compliant", Stock=28051, Supplier 1=Digi-Key
T5 T6: library part BD0810J50100AHF, "XFRMR BALUN RF 800-1000MHZ 0805", Frequency Range="800MHz ~ 1GHz", Manufacturer=Anaren, Package / Case="0805 (2012 Metric)", Supplier Part Number 1=1173-1056-2-ND, Category="RF/IF and RFID", ComponentLink1Description=https://cdn.anaren.com/product-documents/Xinger/BalunTransformers/BD0810J50100AHF/BD0810J50100AHF_DataSheet(Rev_E).pdf, ComponentLink1URL=https://cdn.anaren.com/product-documents/Xinger/BalunTransformers/BD0810J50100AHF/BD0810J50100AHF_DataSheet(Rev_E).pdf, Exact Component Match=no, Impedance - Unbalanced/Balanced="50 / 100 Ohm", Insertion Loss (Max)=0.95dB, Manufacturer Part Number=BD0810J50100AHF, Mounting Type="Surface Mount", Packaging="Cut Tape (CT)", Part Status=Active, Phase Difference=1°, Pricing="1=0.6, 10=0.587, 25=0.3928, 50=0.3494, 100=0.3201, 250=0.28724, 500=0.28124 (EUR)", Return Loss (Min)=13dB, RoHs="RoHS Compliant", Stock=9830, Supplier 1=Digi-Key, Supplier Part Number 2=1173-1056-1-ND
U1: "RF Switch IC SP6T 3GHz 50Ohm 14-QFN (2x2)", Manufacturer="Skyworks Solutions", ComponentLink1Description=Datasheet, ComponentLink1URL=https://www.skyworksinc.com/-/media/SkyWorks/Documents/Products/701-800/SKY13416_485LF_201679I.pdf, Manufacturer Part Number=SKY13416-485LF
U2: "699 – 960 MHz 2-stage Power Amplifier", Manufacturer=Qorvo, Supplier Part Number 1=772-TQP9107, Manufacturer Part Number=TQP9107, Pricing="10000=3.63 (USD)", Stock=1110, Supplier 1=Mouser
U5: "UHF EPC CLASS1 GEN2 READER", Frequency="860MHz ~ 960MHz", Manufacturer="ST Microelectronics", Manufacturer Part Number=ST25RU3993-BQFT, Operating Temperature=-, Package / Case="48-VFQFN Exposed Pad", Supplier Device Package="48-QFN (7x7)", Supplier Part Number 1=AS3993-BQFTTR-ND, Voltage - Supply="2.7 V ~ 3.6 V", Category="RF/IF and RFID", ComponentLink1Description=http://www.ams.com/eng/content/view/download/78518, ComponentLink1URL=http://www.ams.com/eng/content/view/download/78518, Exact Component Match=yes, Interface=-, Packaging="Tape & Reel (TR)", Part Status=Active, Pricing 1="500=40.10842 (EUR)", RoHs="RoHS Compliant", Standards="EPC, ISO 18000-6", Stock 1=0, Supplier 1=Digi-Key, Type="RFID Reader"
U6 U7 U8: library part PE64906MLAA-Z, "IC RF DTC 100-3000MHZ 10QFN", Frequency="100MHz ~ 3GHz", Frequency - Lower=500MHz, Insertion Loss @ Frequency="0.8dB @ 5.8GHz", Isolation @ Frequency="20dB @ 5.8GHz (typ)", Manufacturer="Peregrine Semiconductor", Operating Temperature="-40°C ~ 85°C", Package / Case="10-UFQFN Exposed Pad", Voltage - Supply="2.5 V ~ 5 V", Category="RF/IF and RFID", Circuit=SPDT, ComponentLink1Description=http://www.psemi.com/pdf/datasheets/pe64906ds.pdf, ComponentLink1URL=http://www.psemi.com/pdf/datasheets/pe64906ds.pdf, ComponentLink2Description=http://www.skyworksinc.com/uploads/documents/SKY13431_374LF_201649C.pdf, ComponentLink2URL=http://www.skyworksinc.com/uploads/documents/SKY13431_374LF_201649C.pdf, Exact Component Match=yes, Features=-, Function="Digitally Tunable Capacitor", IIP3="57dBm (typ)", Impedance="50 Ohm", Manufacturer Part Number=PE64906B-Z, P1dB=36dBm, Packaging="Cut Tape (CT)", RF Type="General Purpose", RoHs="RoHS Compliant", Secondary Attributes="SPI Interface", Topology=-

## Via types
v1: diameter 23.62, hole 13.78, Top Layer to Bottom Layer, tented both sides, 16 vias
v2: diameter 25.98, hole 12.99, Top Layer to Bottom Layer, tented both sides, 16 vias

## Nets (pads, with @x,y where several pads share a name; then routed paths per layer and width w, separated by ;. In a path a pad name is that pad's centre, name@x,y a point inside that pad or via, vN(x,y) a via of type N, cw(c..) or ccw(c..) an arc to the next point about the centre after c; other vN are vias at no path point)
ADC: U5.39 | length 1081
  Bottom Layer w7.87: 2561,-2324 2976,-2324 3161.74,-2138.26 3161.74,-1898.75 3045.91,-1782.92
AGD: C63.1 C64.1 U5.42
ANT_SW_V1: 
ANT_SW_V2: 
ANT_SW_V3: 
CBIB: C89.1 U5.9
CBV: C84.1 U5.8
CD1: C61.1 C62.1 U5.41
CD2: C59.1 C60.1 U5.40
CLK: U5.37 U6.5 U7.5 U8.5 | length 1880.3
  Bottom Layer w10: 1774.26,-1368.55 1791.01,-1385.3 1791.01,-1449.01 1872,-1530 1972,-1530 1982.92,-1519.08 1982.92,-1491.58 2016.57,-1491.58 2039.15,-1469 2093,-1469 2158.84,-1403.16 2177,-1403.16 2178.15,-1402 2236.16,-1402 2271.54,-1402 2278.45,-1408.91 2282.13,-1408.91 2299.04,-1392 2369.14,-1392 2375,-1397.86 2375,-1437 2432,-1494 2458.15,-1494 2677.94,-1713.78 2864.78,-1713.78 2899.19,-1748.19 2899.19,-1790.36 2917.83,-1809 2948,-1809 ; 2957,-1740 2954.39,-1742.61 2954.39,-1765.42 2948,-1771.81 2948,-1809 ; 3099,-1927 3099,-1875 3071.49,-1847.49 2998.49,-1847.49 2967,-1816 2960,-1809 2948,-1809
COMN_A: C80.1 U5.48
COMN_B: C82.1 U5.2
COMP_A: C79.1 U5.47
COMP_B: C81.1 U5.1
EN: U5.31 | length 487.1
  Bottom Layer w10: 2834,-1802 2834,-1825 2866,-1857 2866,-1917 3000.8,-2051.8 3000.8,-2205.13 2998.68,-2207.25 2998.68,-2215.32 2996,-2218
ETC_1: U6.6 | length 2559.7
  Bottom Layer w10: 1766,-1409 1766,-1412.67 1761.72,-1416.95 ccw(c1768.79,-1424.02) 1758.79,-1424.02 1758.79,-1613.93 1722.72,-1649.99 1722.72,-1701.87 1728.86,-1708 1815.87,-1708 1827.87,-1720 1903,-1720 1956,-1773 1998,-1773 2037,-1812 2037,-1867 2062.09,-1892.09 2078.13,-1892.09 2201.38,-2015.35 2201.38,-2019.19 2309,-2126.81 2309,-2600 2841,-3132 3068,-3132
ETC_2: U7.6 | length 2385
  Bottom Layer w10: 2071,-1493 2132.49,-1493 2137.84,-1487.65 2195.65,-1487.65 2247.61,-1539.61 2247.61,-1676.37 2246.54,-1677.43 2246.54,-1695.5 2247.61,-1696.56 2247.61,-1948.61 2385.76,-2086.76 2385.76,-2309.28 2343,-2352.04 2343,-2579 2699,-2935 3265,-2935
ETC_3: U8.6 | length 2264.5
  Bottom Layer w10: 2347,-1423 2347,-1755 2556,-1964 2556,-1994 2405,-2145 2405,-2518 2587,-2700 3350,-2700
GND: C12.2 C13.2 C14.1 C15.2 C18.2 C19.2 C34.2 C52.1 C53.2 C57.1 C58.2 C59.2 C60.2 C61.2 C62.2 C63.2 C64.2 C66.2 C68.2 C70.2 C71.2 C72.2 C73.2 C74.2 C75.2 C76.2 C78.2 C85.2 C87.2 C89.2 C90.2 C95.2 C105.2 S1.5 S1.7 T2.3 T2.4 T4.3 T4.4 T5.2 T5.5 T6.2 T6.5 U1.15 U2.3 U2.4 U2.5 U2.6 U2.8 U2.9 U2.10 U2.14 U5.5 U5.15 U5.18 U5.19 U5.22 U5.25 U5.49 U6.3 U6.8 U6.9 U6.10 U7.3 U7.10 U8.3 U8.8 U8.9 U8.10
  other v1: 1990.8,-2090.01 2018.36,-2090.01 2045.91,-2090.01 2073.47,-2090.01 2101.03,-2090.01 1977.02,-2062.45 2004.58,-2062.45 2032.13,-2062.45 2059.69,-2062.45 2087.25,-2062.45 2114.81,-2062.45 1990.8,-2034.89 2018.36,-2034.89 2045.91,-2034.89 2073.47,-2034.89 2101.03,-2034.89
  other v2: 2753.59,-1675.64 2800.83,-1675.64 2848.08,-1675.64 2895.32,-1675.64 2753.59,-1628.39 2800.83,-1628.39 2848.08,-1628.39 2895.32,-1628.39 2753.59,-1581.15 2800.83,-1581.15 2848.08,-1581.15 2895.32,-1581.15 2753.59,-1533.91 2800.83,-1533.91 2848.08,-1533.91 2895.32,-1533.91
IN_N: U5.6
IN_P: U5.4
IRQ: U5.32 | length 543.8
  Bottom Layer w10: 2853.98,-1763.24 2854.75,-1763.24 2854.75,-1791.9 2855.81,-1792.97 2855.81,-1819.81 2888.34,-1852.34 2888.34,-1894.93 3055.94,-2062.52 3055.94,-2132.4 3044,-2144.33 3044,-2218
LF_CEXT: U5.45
LP_Filter_IN: 
LP_Filter_OUT: T2.6
MISO: U5.34
MOSI: U5.35 U6.7 U7.7 U8.7 | length 1704.6
  Bottom Layer w7.87: 1823.47,-1427.77 1823.47,-1447.57 1834.02,-1458.12 2007.88,-1458.12 2028.9,-1437.1 2045.27,-1437.1 2045.91,-1436.46 2045.91,-1432.2 2038,-1424.29 2038,-1350 2062.56,-1325.44 2291.17,-1325.44 2310.24,-1306.37 2310.24,-1301.88 2325.26,-1286.86 2372,-1286.86 ; 2349.06,-1361.66 2372,-1338.72 2372,-1286.86 ; 2921,-1768 2923,-1766 2923,-1493 2904,-1474 2718,-1474 2691.21,-1447.21 2611.5,-1447.21 2597.88,-1433.59 2596.37,-1433.59 2570.78,-1408 2528,-1408 2406.86,-1286.86 2372,-1286.86
NCS: U5.33 | length 1528
  Bottom Layer w7.87: 1750,-3250 2280,-2720 2280,-2459 ; 2723,-2101 2723,-1978 2803,-1898 2803,-1771 2845.24,-1728.76 2851.76,-1728.76 2878,-1755 2878,-1806
NetANT1_IN: 
NetANT2_IN: 
NetANT3_IN: 
NetANT4_IN: 
NetANT5_IN: 
NetANT6_IN: 
NetC2_1: U1.3
NetC4_2: 
NetC5_2: 
NetC6_1: 
NetC7_2: 
NetC8_1: U1.9
NetC9_1: U1.2
NetC10_1: U1.10
NetC11_1: U1.1
NetC13_1: C13.1 U5.11
NetC16_1: C105.1 U2.2
NetC17_2: 
NetC21_1: U1.11
NetC32_1: 
NetC32_2: 
NetC37_1: T4.2 U6.1 U6.2 U7.1 U7.2
NetC37_2: 
NetC51_1: 
NetC91_1:  | length 275.8
  Power w31.5: 2577,-1533 2618,-1533 2681,-1470 2681,-1337 2690,-1328
NetC104_3: 
NetC107_1: 
NetC107_2: S1.6
NetC108_1: S1.4
NetC108_2: 
NetC109_1: S1.2
NetC110_1: 
NetC111_1: 
NetC112_1: U1.13
NetC112_2: T4.6
NetFB4_2: 
NetJ1_IN: T5.1
NetJ1_OUT: U2.13
NetJ3_IN: T4.5
NetJ3_OUT: T6.1
NetL12_2: U7.8 U7.9 U8.1 U8.2
NetR1_2: U1.7 | length 2116.4
  Bottom Layer w10: 1668.83,-913.06 1668.83,-954.59 1661.06,-962.36 1661.06,-1056.43 1630.72,-1086.78 1597.22,-1086.78 1292.06,-1391.94 1292.06,-2438.97 1323.09,-2470 1694,-2470
NetR2_2: U1.6 | length 2038.6
  Bottom Layer w10: 1703.17,-909.06 1703.17,-941.46 1676.06,-968.57 1676.06,-983.43 1680.36,-987.72 1680.36,-1058.35 1630.59,-1108.12 1603.42,-1108.12 1320.36,-1391.17 1320.36,-2322.49 1436.93,-2439.06 1702.13,-2439.06 1712.19,-2429 1715,-2429
NetR3_2: U1.5 | length 1998.5
  Bottom Layer w10: 1734,-909 1734,-912.79 1721.06,-925.73 1721.06,-961.26 1728.94,-969.13 1728.94,-1029.48 1695.36,-1063.06 1695.36,-1064.57 1636.8,-1123.12 1609.63,-1123.12 1364,-1368.75 1364,-1704 1436.97,-1776.97 1436.97,-2394.14 1442.83,-2400 1742,-2400
NetR10_1: U2.11
NetR20_1: U2.12
NetR21_2: U2.1
NetR22_2: T2.2
NetR23_2: 
NetR24_2: T2.5
NetT2_1: T2.1 T4.1
OAD: U5.27 | length 139
  Bottom Layer w7.87: 2689,-1878 2716,-1851 2716,-1802.8 2730.39,-1788.4 2736.6,-1788.4 2755,-1770
OAD2: U5.26
OSCI: U5.29
OSCO: U5.30
PA_OUT: U2.7
PA_SW_V1: S1.1 | length 960.6
  Bottom Layer w11.81: 1496,-2369 1496,-2149.38 1493,-2146.38 1493,-1931.46 1510,-1914.46 1510,-1812.88 1503.32,-1806.19 1503.32,-1804.69 1485.62,-1786.99 1485.62,-1738.62 1466,-1719 1466,-1645 1520,-1591 1562.01,-1591 1564.06,-1588.94 1567.06,-1588.94 1583,-1573 1646.31,-1573
PA_SW_V2: S1.3 | length 883.7
  Bottom Layer w11.81: 1462,-2373 1462,-1766.61 1436.46,-1741.08 1436.46,-1626.54 1497,-1566 1538,-1566
PAOUT_N: U5.16 U5.17
PAOUT_P: U5.20 U5.21
RF_DETECTOR:  | length 545.5
  Bottom Layer w11.81: 1402,-2373 1402,-2369.7 1408,-2363.7 1408,-1830
RFO_N: U5.23
RFO_P: U5.24
RX_N: T6.3
RX_P: T6.4
TX_N: T5.4
TX_P: T5.3
VBPD: C34.1 C52.2 U5.28
VCC_3V3: C15.1 C18.1 C19.1 C53.1 C68.1 C70.1 C87.1 C95.1 U1.4 U5.38 U6.4 U7.4 U8.4
VCO: 
VDD_A: C73.1 C74.1 U5.44
VDD_B: C57.2 C58.1 C78.1 U5.12 | length 994.2
  Power w23.62: 2545.91,-1735.68 2593.16,-1782.92 ; 2565.31,-1459.44 2569,-1455.75 2569,-1342.7 2623.93,-1287.76 2704.76,-1287.76 2728.91,-1311.91 2728.91,-1359.33 2756,-1386.42 2756,-1445.87 2691.58,-1510.28 2691.58,-1684.5 2593.16,-1782.92 ; 2640.4,-1830.17 2593.16,-1782.92
VDD_MIX: C79.2 C80.2 C81.2 C82.2 C84.2 C85.1 U5.3 U5.7 U5.10 | length 246.8
  Power w15.75: 2774,-1317 2916.81,-1317 2920.81,-1321 2954.28,-1321 2963.51,-1330.23 2963.51,-1382.06
VDD_PA: C12.1 C14.2 C66.1 U5.13 | length 276.8
  Power w23.62: 2506.54,-1712.06 2516.51,-1712.06 2534.18,-1694.38 2534.18,-1625.17 2511.38,-1602.36 2511.38,-1533.14 2546.54,-1497.98 2567.94,-1497.98
VDDLF: C75.1 C76.1 U5.46
VEXT_PA: C90.1 U5.14
VOSC: C71.1 C72.1 U5.43
VPA_4V1: 
VSUP_3V6: 
pads on no net: T5.6 T6.6 U1.8 U1.12 U1.14 U5.36

## Polygon pours and split planes (outlines as drawn)
VCC_3V3 on Power "VCC_3V3_L03_P101" (solid, pour order 101): 400,-1100 0,-700 0,0 3350,0 3350,-2850 2950,-3250 1550,-3250 1150,-2850 1150,-1100
VSUP_3V6 on Power "VSUP_3V6_L03_P100" (solid, pour order 100): 2449.06,-1964 cw(c2449.06,-1864) 2349.06,-1864 2348.72,-1316.66 cw(c2355.33,-1349.71) 2355.35,-1316 2462,-1316 2530,-1316 cw(c2530,-1327) 2541,-1327 2541,-1427.19 cw(c2493.2,-1427.2) 2493.19,-1475 2493.19,-1682.96 ccw(c2681.23,-1682.96) 2681.24,-1871 2858,-1871 2858,-2626 1256,-2626 1256,-1708 1151.84,-1708 1155.39,-1509.06 1308,-1509.06 1308,-1546 ccw(c1408,-1546) 1408,-1646 1435,-1646 1435,-2426 2593.19,-2426 2593.19,-1964
VPA_4V1 on Power "VPA_4V1_L03_P099" (solid, pour order 99): 2135,-1981 2208,-1981 cw(c2208,-2230) 2457,-2230 2457,-2270 cw(c2402,-2270) 2402,-2325 1939,-2325 cw(c1939,-2309) 1923,-2309 1923,-1510 1150,-1510 1150,-1406 1149,-1405 2135,-1405
GND on GND "GND_L02_P103" (solid, pour order 103): 400,-1100 0,-700 0,0 3350,0 3350,-2850 2950,-3250 1550,-3250 1150,-2850 1150,-1100
GND on Bottom Layer "GND_L04_P104" (solid, pour order 104): 400,-1100 0,-700 0,0 3350,0 3350,-2850 2950,-3250 1550,-3250 1150,-2850 1150,-1100
GND on Top Layer "Top GND" (solid, shelved, pour order 102): 400,-1100 0,-700 0,0 3350,0 3350,-2850 2950,-3250 1550,-3250 1150,-2850 1150,-1100

## Silkscreen, mask and mechanical layers (free items; w line width, h text height)
Top Overlay:
  drawing of 19 lines, arcs and shapes, not listed
  text "50 Ω" at 539,-253 h59.06 r90
  text "50 Ω" at 1573,-253 h59.06 r90
  text "50 Ω" at 2084,-253 h59.06 r90
  text "50 Ω" at 2586,-256 h59.06 r90
  text "50 Ω" at 3097,-256 h59.06 r90
  text "50 Ω" at 1062,-260 h59.06 r90
  text "ST25RU3993 RF Module" at 1661,-2674 h60
  text "Rev: E" at 2067,-2770 h60
Bottom Solder:
  region: 2937.65,-1491.58 2711.27,-1491.58 2711.27,-1717.96 2937.65,-1717.96
  region: 2238.83,-1922.68 1853,-1922.68 1853,-2198.28 2238.83,-2198.28
Board Outline:
  the board outline again, w10
Top Assembly:
  text "(ASSY) SHEET 1 OF 2" at 14145.5,-7225.5 h100
M16_SheetSym:
  lines w5: -4283,3874 -3983,3874 ; -948,-7376 -948,-7076 ; -948,7324 -948,7624 ; 2382,-7376 2382,-7076 ; 2382,7324 2382,7624 ; 5717,-7376 5717,-7076 ; 5717,7324 5717,7624 ; 9047,-7376 9047,-7076 ; 9047,6224 15417,6224 ; 9047,6524 15417,6524 ; 9047,6824 15417,6824 ; 9047,7024 15417,7024 ; 9047,7624 9047,7324 9047,5924 15417,5924 ; 9517,-7076 10917,-7076 ; 9547,5924 9547,7324 ; 10247,5924 10247,7324 ; 10692,-6851 12417,-6851 ; 10692,-6626 12417,-6626 ; 10692,-6376 12417,-6376 ; 10692,-6101 12417,-6101 ; 12382,-7376 12382,-7076 ; 12382,7324 12382,7624 ; 12417,-7076 12417,-6476 ; 12417,-6776 15417,-6776 ; 13223,5924 13223,7321.5 ; 14447,5924 14447,7324 ; 14517,-7076 14517,-6476 ; 15417,-6476 12417,-6476 ; 15417,-3626 15717,-3626 ; 15417,124 15717,124 ; 15417,3874 15717,3874 ; 12417,-6476 12417,-5876 ; 12417,-5876 10692,-5876 10692,-7076 15417,-7076 ; 12417,-5876 15417,-5876 15417,-7076 ; 15417,-7076 15417,7324 -3983,7324 -3983,-7076 15417,-7076 ; -4283,-7376 15717,-7376 15717,7624 -4283,7624 -4283,-7376
  text "1" at -2631.66,7439 h125
  text "2" at 694,7439 h125
  text "3" at 4024,7439 h125
  text "4" at 7359,7439 h125
  text "5" at 10684,7439 h125
  text "6" at 14019,7439 h125
  text "REVISIONS" at 11660.5,7110.5 h125
  text "ZONE" at 9079.5,6866.5 h125
  text "LETTER" at 9612.5,6866.5 h125
  text "DATE" at 13624.5,6866.5 h125
  text "APPROVED" at 14501.5,6867 h125
  text "DESCRIPTION" at 10290.5,6866 h125
  text "REDESIGN BASED ON EVAL BOARD" at 10342,6624 h100
  text "NA" at 9212,6614 h125
  text "E" at 9864.12,6614 h100
  text "PDC" at 14778.12,6614 h100
  text "02/07/2022" at 13335,6611 h100
  text "A" at -4153,5661 h125
  text "A" at 15547,5661 h125
  text "B" at 15547,1911 h125
  text "C" at 15547,-1839 h125
  text "template rev: 2.4" at 15477,-3576 h40 r90
  text "D" at -4153,-5589 h125
  text "D" at 15547,-5589 h125
  text "DATE:" at 11717,-5967.5 h75
  text "ENGINEER:" at 10715,-5973 h75
  text "ST25RU3993 RF Module" at 13011.5,-6049.5 h125
  text "TITLE:" at 12473,-6056.5 h125
  text "02/07/2022" at 11711.13,-6065.27 h75
  text "Patrick Carberry" at 10761.13,-6066.27 h75
  text "DATE:" at 11717,-6192.5 h75
  text "PCB DESIGNER:" at 10712,-6197.5 h75
  text "Patrick Carberry" at 10761.13,-6315.27 h75
  text "02/07/2022" at 11714.13,-6322.27 h75
  text ".Plot_File_Name" at 12487,-6329 h80
  text "DATE:" at 11717,-6467.5 h75
  text "ISSUED BY:" at 10715,-6474.5 h75
  text "Patrick Carberry" at 10747.63,-6582.77 h75
  text "02/07/2022" at 11700.63,-6589.77 h75
  text "Drawing Size: C" at 12471,-6685.5 h125
  text "REV:" at 14581,-6689 h125
  text "E" at 15071.5,-6689.5 h125
  text "FILE NAME:" at 10717,-6701 h60
  text ".PCB_FILE_NAME_NO_PATH" at 10717,-6799 h60
  text "PRINTED:" at 10717,-6926 h60
  text "SCALE: N/A" at 14557,-6970 h100
  text ".PRINT_DATE" at 10717,-7034 h75
  text "1" at -2631.66,-7261 h125
  text "2" at 694,-7261 h125
  text "3" at 4024,-7261 h125
  text "4" at 7359,-7261 h125
  text "5" at 10684,-7261 h125
  text "6" at 14019,-7261 h125
Drill Drawing:
  drawing of 373 lines, arcs and shapes, not listed
  text "Layer" at 4160.74,-53 h60
  text "Name" at 4570.65,-53 h60
  text "Material" at 5500.4,-53 h60
  text "Thickness" at 6360.16,-53 h60
  text "Constant" at 7010,-53 h60
  text "Board Layer Stack" at 7579.86,-53 h60
  text "Top Overlay" at 4570.65,-173 h60
  text "Top Solder" at 4570.65,-293 h60
  text "Solder Resist" at 5500.4,-293 h60
  text "1.00mil" at 6360.16,-293 h60
  text "4.5" at 7010,-293 h60
  text "1" at 4160.74,-413 h60
  text "Top Layer" at 4570.65,-413 h60
  text "1.70mil" at 6360.16,-413 h60
  text "Dielectric1" at 4570.65,-533 h60
  text "FR408HR" at 5500.4,-533 h60
  text "7.96mil" at 6360.16,-533 h60
  text "3.69" at 7010,-533 h60
  text "2" at 4160.74,-653 h60
  text "GND" at 4570.65,-653 h60
  text "0.68mil" at 6360.16,-653 h60
  text "Dielectric2" at 4570.65,-773 h60
  text "FR408HR" at 5500.4,-773 h60
  text "47.00mil" at 6360.16,-773 h60
  text "3.69" at 7010,-773 h60
  text "3" at 4160.74,-893 h60
  text "Power" at 4570.65,-893 h60
  text "0.68mil" at 6360.16,-893 h60
  text "Dielectric 1" at 4570.65,-1013 h60
  text "FR408HR" at 5500.4,-1013 h60
  text "7.96mil" at 6360.16,-1013 h60
  text "3.69" at 7010,-1013 h60
  text "4" at 4160.74,-1133 h60
  text "Bottom Layer" at 4570.65,-1133 h60
  text "1.70mil" at 6360.16,-1133 h60
  text "Bottom Solder" at 4570.65,-1253 h60
  text "Solder Resist" at 5500.4,-1253 h60
  text "1.00mil" at 6360.16,-1253 h60
  text "4.5" at 7010,-1253 h60
  text "Bottom Overlay" at 4570.65,-1373 h60
  text "Symbol" at 4182.5,-1671.5 h72
  text "Count" at 4688.38,-1671.5 h72
  text "Hole Size" at 5288.22,-1671.5 h72
  text "Plated" at 6377.9,-1671.5 h72
  text "Via/Pad" at 6883.78,-1671.5 h72
  text "1" at 4688.38,-1821.5 h60
  text "15.75mil (0.400mm)" at 5288.22,-1821.5 h60
  text "PTH" at 6377.9,-1821.5 h60
  text "Via" at 6883.78,-1821.5 h60
  text "6" at 4688.38,-1971.5 h60
  text "47.24mil (1.200mm)" at 5288.22,-1971.5 h60
  text "PTH" at 6377.9,-1971.5 h60
  text "Pad" at 6883.78,-1971.5 h60
  text "15" at 4688.38,-2121.5 h60
  text "7.87mil (0.200mm)" at 5288.22,-2121.5 h60
  text "PTH" at 6377.9,-2121.5 h60
  text "Via" at 6883.78,-2121.5 h60
  text "16" at 4688.38,-2271.5 h60
  text "12.99mil (0.330mm)" at 5288.22,-2271.5 h60
  text "PTH" at 6377.9,-2271.5 h60
  text "Via" at 6883.78,-2271.5 h60
  text "24" at 4688.38,-2421.5 h60
  text "59.06mil (1.500mm)" at 5288.22,-2421.5 h60
  text "PTH" at 6377.9,-2421.5 h60
  text "Pad" at 6883.78,-2421.5 h60
  text "55" at 4688.38,-2571.5 h60
  text "40.00mil (1.016mm)" at 5288.22,-2571.5 h60
  text "PTH" at 6377.9,-2571.5 h60
  text "Pad" at 6883.78,-2571.5 h60
  text "66" at 4688.38,-2721.5 h60
  text "13.78mil (0.350mm)" at 5288.22,-2721.5 h60
  text "PTH" at 6377.9,-2721.5 h60
  text "Via" at 6883.78,-2721.5 h60
  text "316" at 4688.38,-2871.5 h60
  text "11.81mil (0.300mm)" at 5288.22,-2871.5 h60
  text "PTH" at 6377.9,-2871.5 h60
  text "Via" at 6883.78,-2871.5 h60
  text "460" at 4688.38,-3021.5 h60
  text "8.00mil (0.203mm)" at 5288.22,-3021.5 h60
  text "PTH" at 6377.9,-3021.5 h60
  text "Via" at 6883.78,-3021.5 h60
  text "959 Total" at 4688.38,-3171.5 h60
Bottom Assembly:
  lines w5: -3993,-6786 -993,-6786 ; -3993,-6486 -993,-6486 ; -3093,-7086 -3093,-6486 ; -993,-7086 -993,-6486 ; -993,-6861 732,-6861 ; -993,-6636 732,-6636 ; -993,-6386 732,-6386 ; -993,-6111 732,-6111 ; -958,-7386 -958,-7086 ; -958,7314 -958,7614 ; 507,-7086 1907,-7086 ; 2377,-7386 2377,-7086 ; 2377,7314 2377,7614 ; 5707,7314 5707,7614 ; 9042,-7386 9042,-7086 ; 9042,7314 9042,7614 ; 12372,-7386 12372,-7086 ; 12372,7314 12372,7614 ; -3993,-7086 -3993,-5886 -993,-5886 ; -3993,-7086 -3993,7314 15407,7314 15407,-7086 -3993,-7086 ; -3993,-7086 732,-7086 732,-5886 -993,-5886 ; -993,-6486 -993,-5886 ; -4293,-7386 -4293,7614 15707,7614 15707,-7386 -4293,-7386
  text "2" at 10733.5,7401.5 h125
  text "5" at 733.5,7398.5 h125
  text "4" at 4065,7398.5 h125
  text "3" at 7400,7398.5 h125
  text "1" at 14055.66,7395 h125
  text "6" at -2591.5,7388.5 h125
  text "D" at -4092.5,-5599 h125
  text "D" at 15597.5,-5599 h125
  text "DATE:" at -256.5,-5977.5 h75
  text "ENGINEER:" at 703,-5977.5 h75
  text "TITLE:" at -1050.5,-6067.5 h125
  text "SEE SHEET 1" at -1548.88,-6075 h125
  text "SEE SHEET 1" at 705.5,-6081.5 h75
  text "SEE SHEET 1" at -318.31,-6083.68 h75
  text "DATE:" at -256.5,-6202.5 h75
  text "PCB DESIGNER:" at 703,-6202.5 h75
  text "SEE SHEET 1" at 710.5,-6331.5 h75
  text "SEE SHEET 1" at -308.31,-6332.68 h75
  text ".Plot_File_Name" at -1093,-6436 h125
  text "ISSUED BY:" at 704.5,-6487 h75
  text "DATE:" at -257,-6489.5 h75
  text "SEE SHEET 1" at 695.5,-6596.5 h75
  text "SEE SHEET 1" at -297.31,-6604.68 h75
  text "REV:" at -3134,-6619 h100
  text "Drawing Size: C" at -1379,-6694.5 h125
  text "FILE NAME:" at 702.5,-6731 h70
  text "SEE SHEET 1" at -3158.5,-6741.5 h80
  text "SEE SHEET 1" at 709,-6837.5 h70
  text "PRINTED:" at 706,-6952.5 h70
  text "SCALE: N/A" at -3136,-6984 h100
  text "SEE SHEET 1" at -1223.5,-6999.5 h125
  text ".PRINT_DATE" at 708.5,-7059 h70
  text "(ASSY) SHEET 2 OF 2" at -2747,-7232 h90
  text "6" at -2595,-7271 h125
  text "5" at 740,-7271 h125
  text "2" at 10730,-7271 h125
  text "1" at 14055.66,-7271 h125